# Altium PCB ui_layout-v1.3.PcbDoc
Units mil, origin at the board's own origin, x right, y up, seen from the top; angles counter-clockwise.
Board outline 3110.07 x 2131 mil, 4 copper layers (L1_Signal, L2_PWR, L3_GND, L4_Signal), stack 61.811 mil thick; 83 components, 75 nets, 291 pads, 633 vias.
Unrouted connection lines stored in the file: 88.
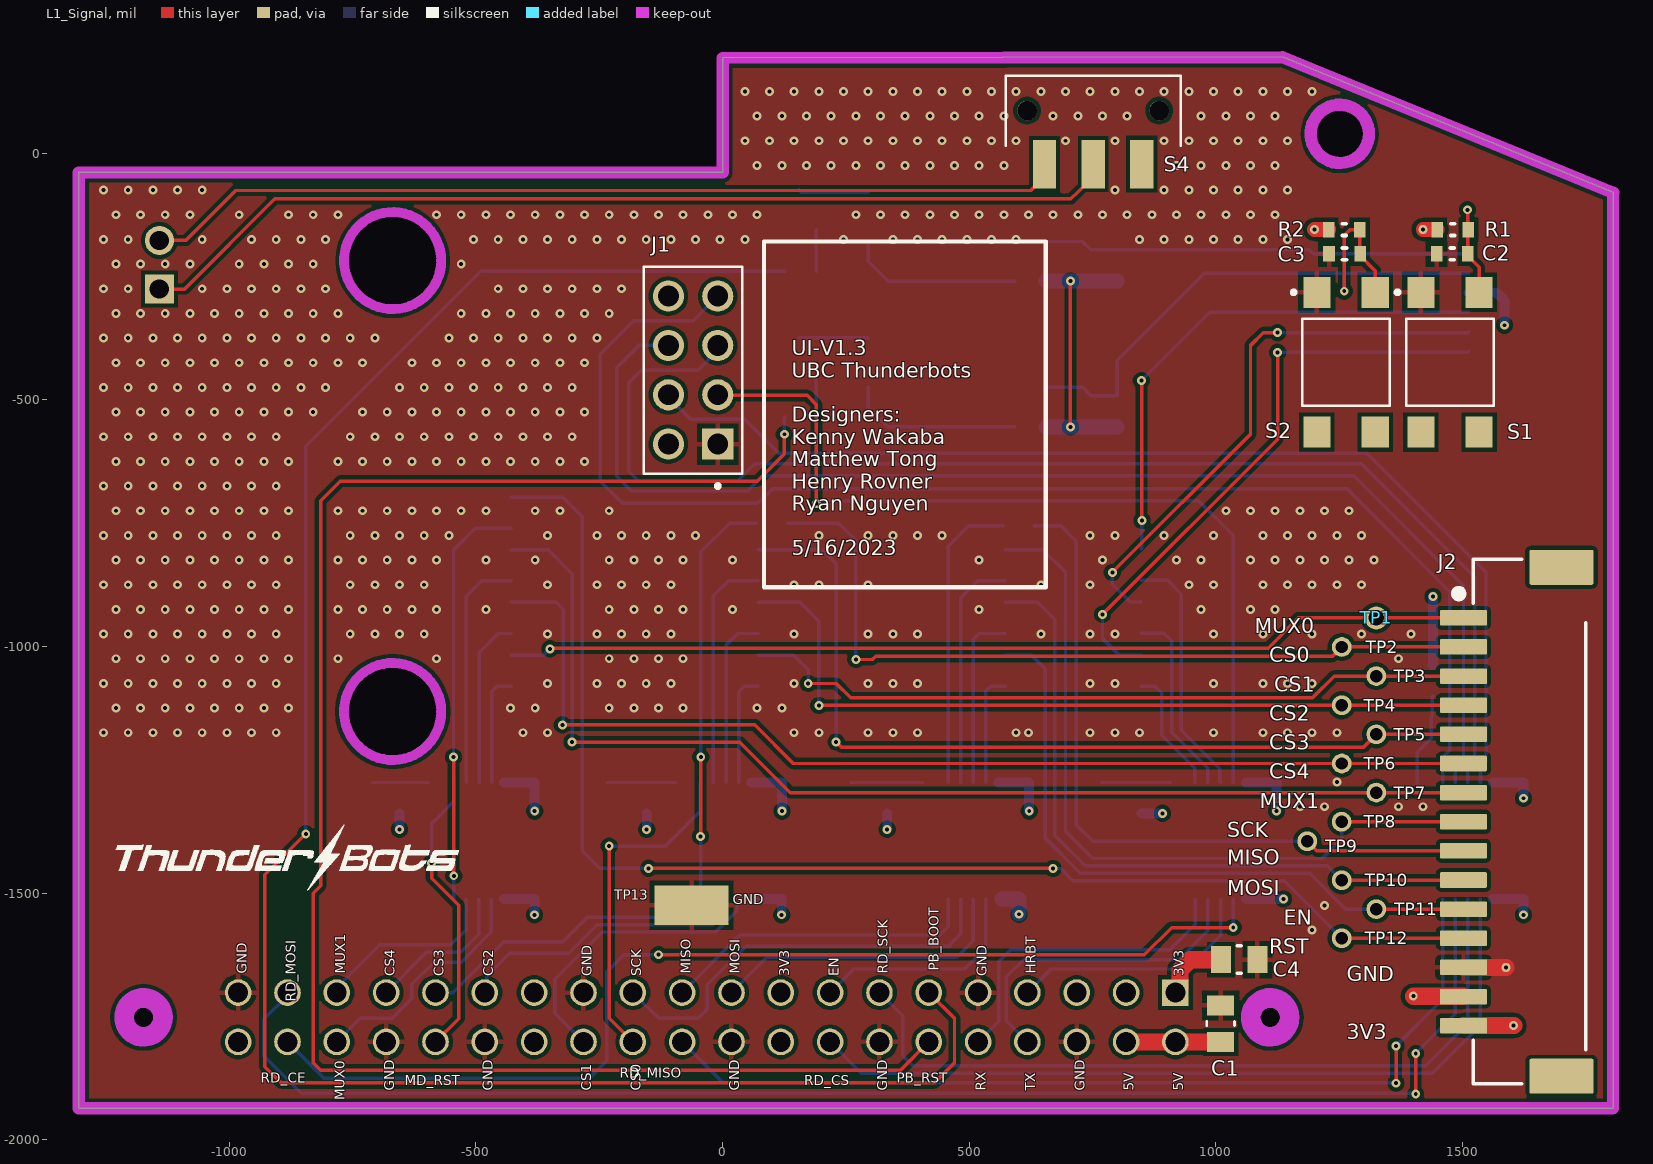
[diagram p0: L1_Signal view]
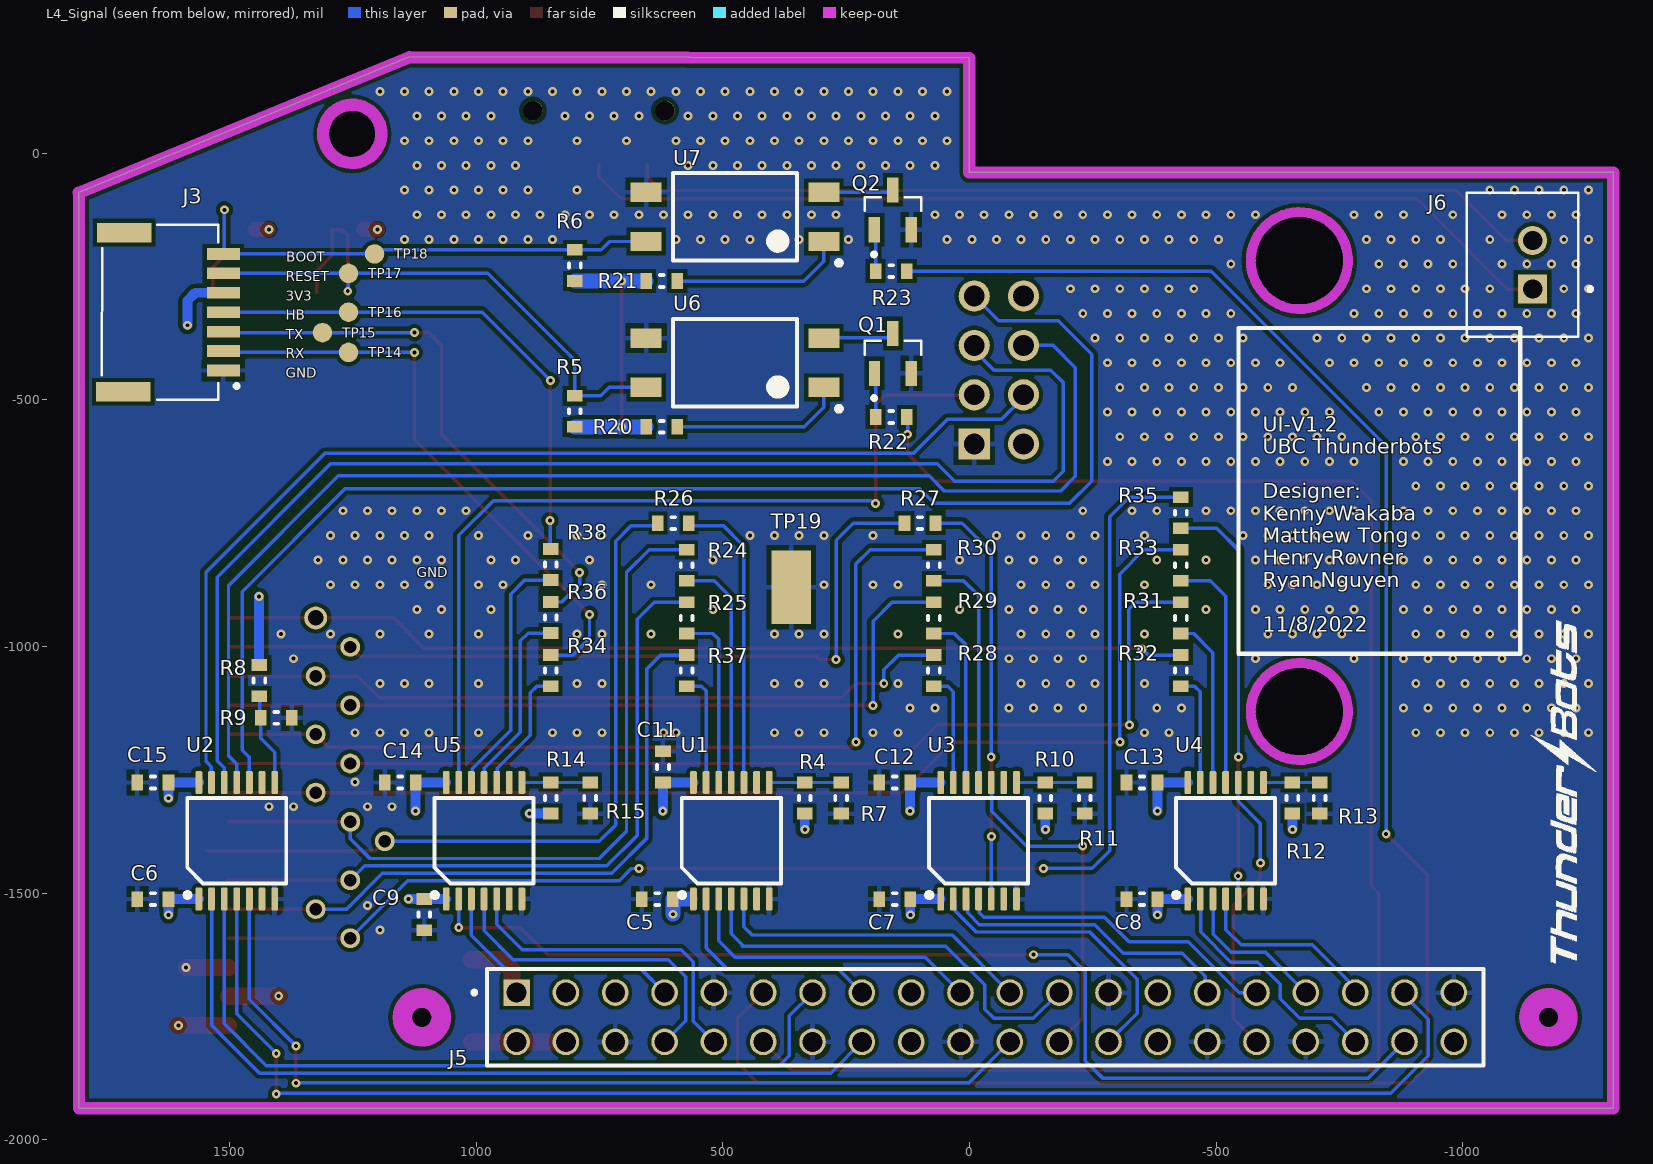
[diagram p1: L4_Signal view, seen from below]
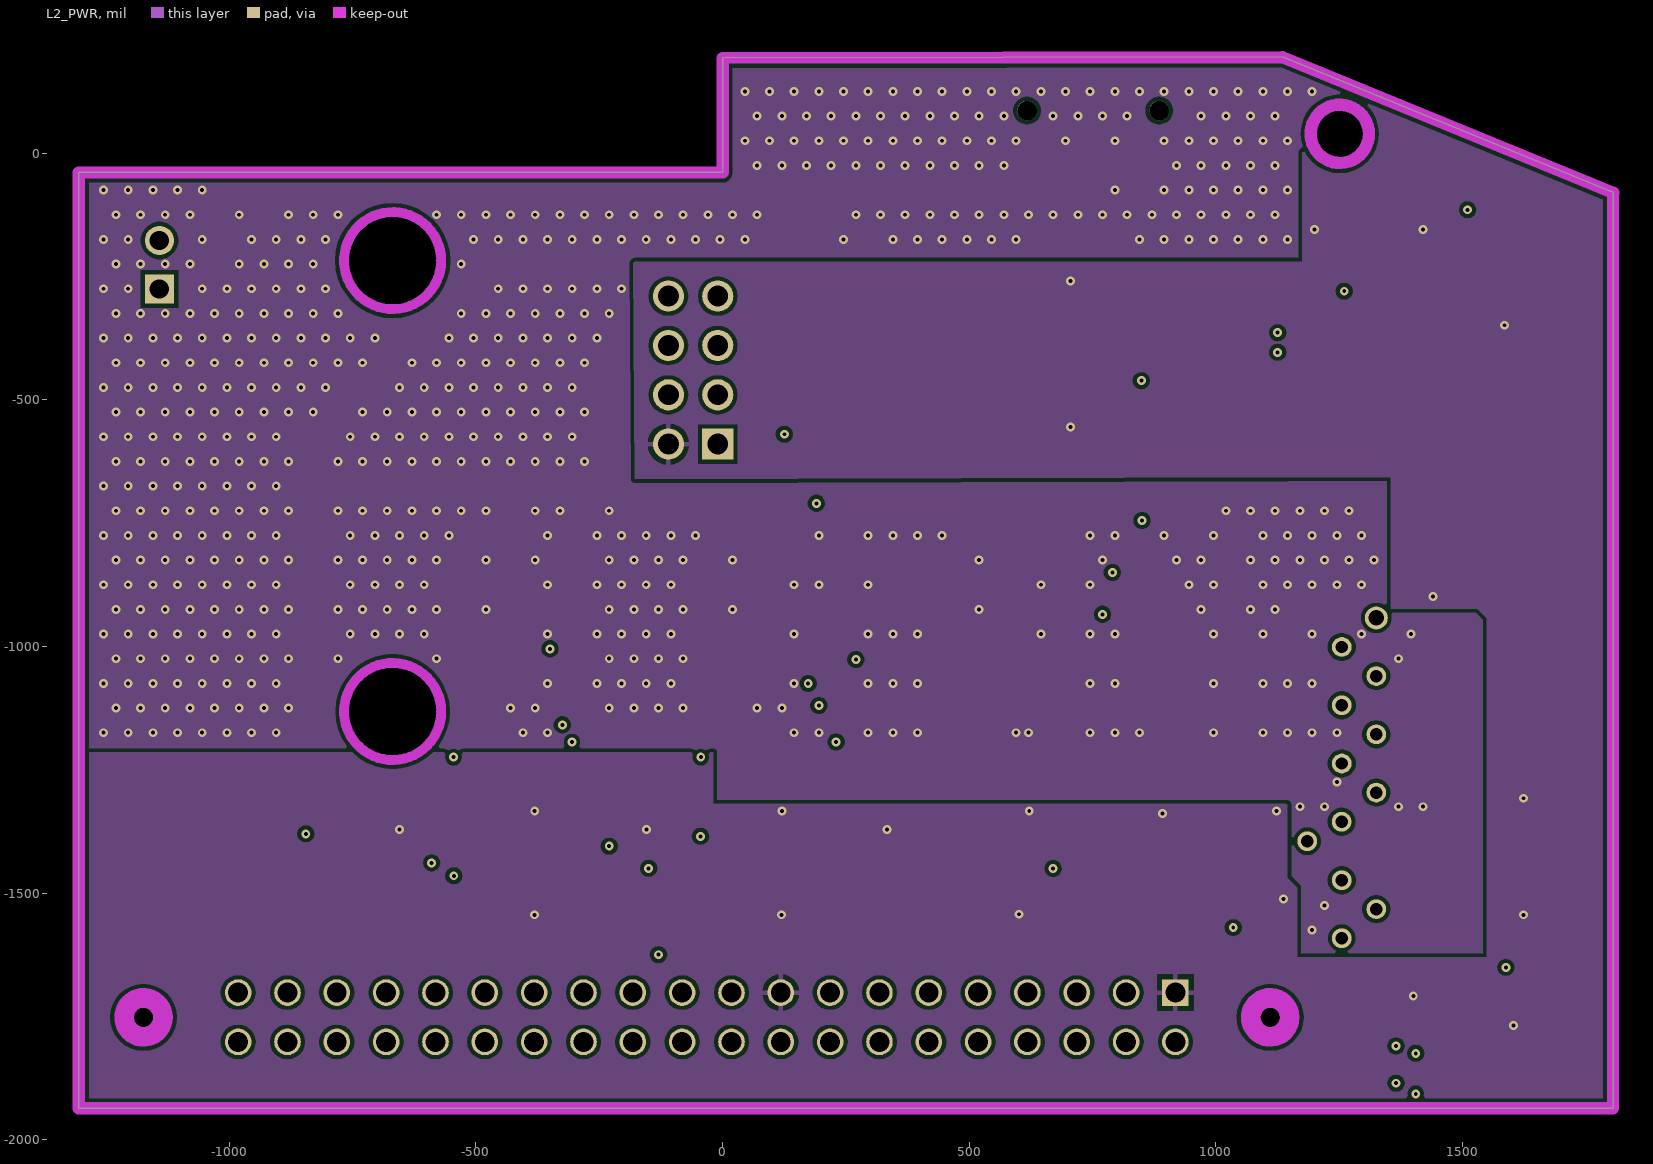
[diagram p2: L2_PWR]
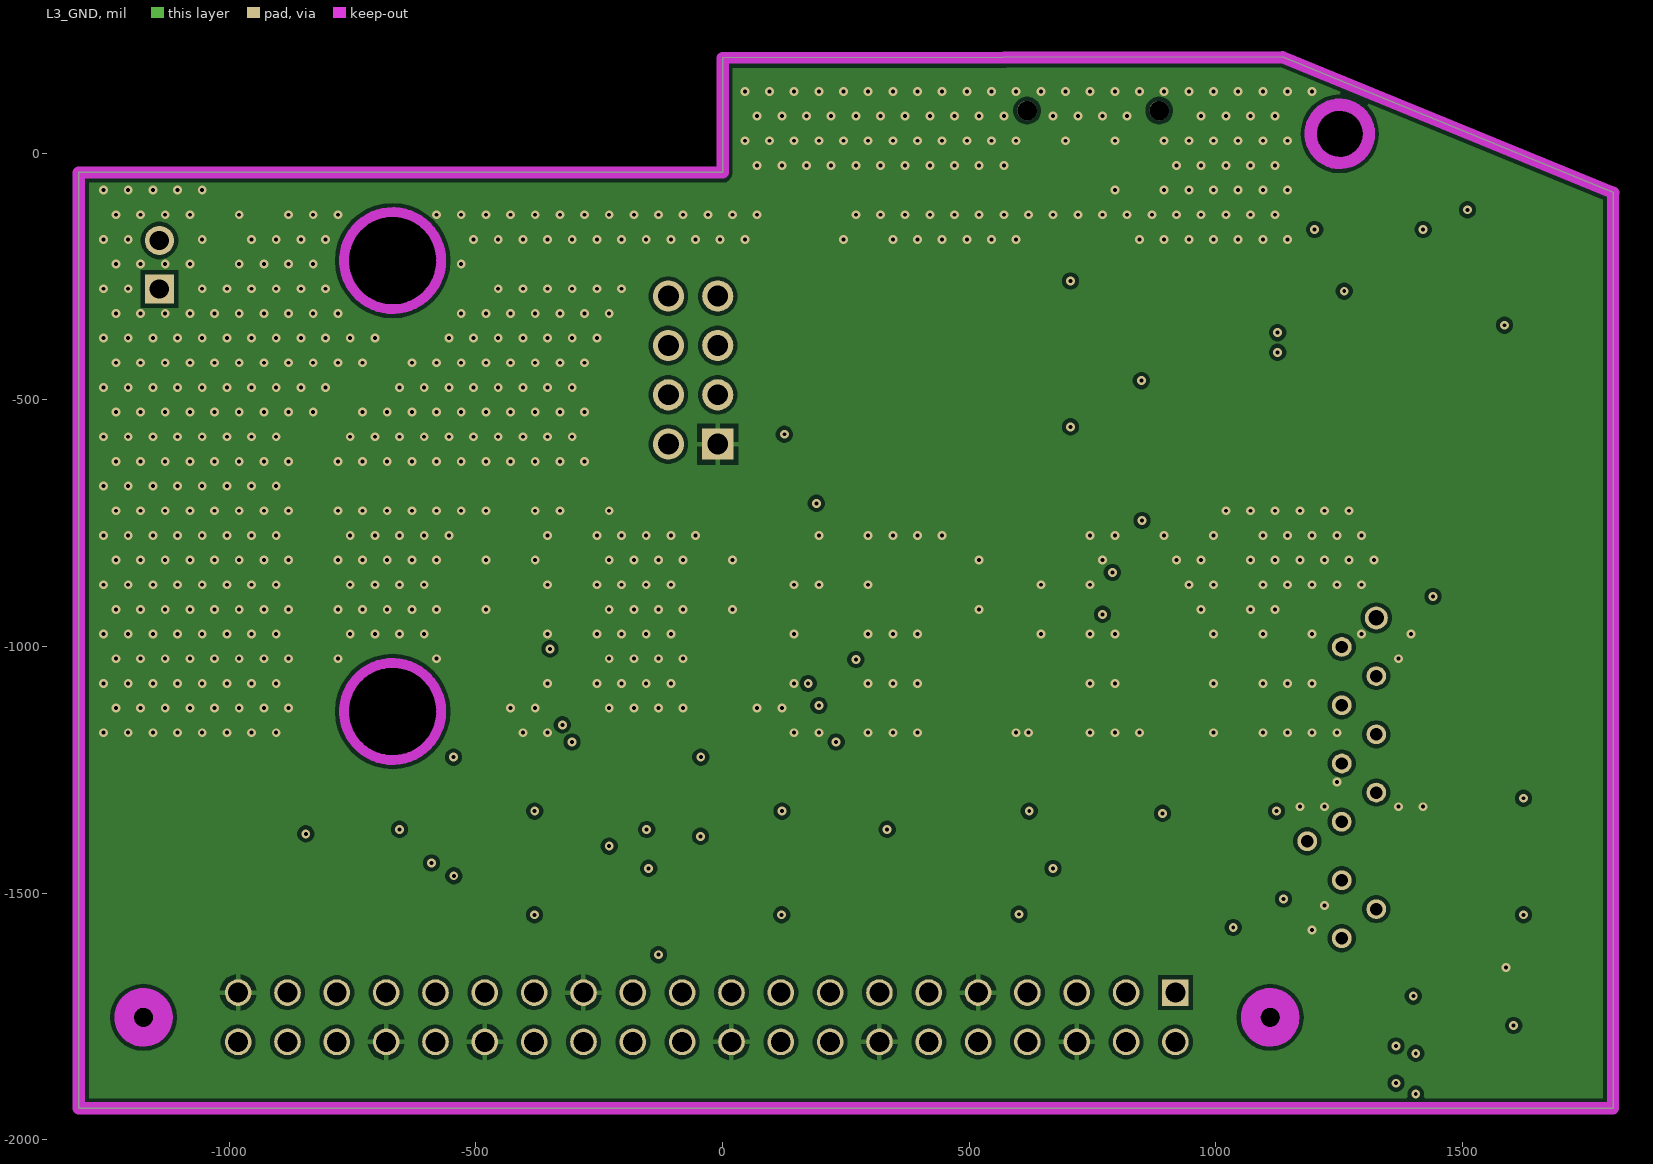
[diagram p3: L3_GND]

## Layer stack, top to bottom
Top Mask: solder mask 0.591, Solder Resist, Dk 3.8
L1_Signal: signal copper 1.378
Dielectric 1: prepreg 3.937, 2313, Dk 4.05
L2_PWR: signal copper 0.689
Core: core 49.803, FR-4, Dk 4.5
L3_GND: signal copper 0.689
Dielectric 2: prepreg 3.937, 2313, Dk 4.05
L4_Signal: signal copper 1.378
Bottom Mask: solder mask 0.591, Solder Resist, Dk 3.8

## Board outline
-1305,-1936 1805,-1936 1805,-1934 1805,-80 1805.07,-79.82 1135,195 0,193.14 0,-39.37 -1305,-39.37

## Design rules (kind name [scope] priority, off if disabled: settings)
BoardOutlineClearance [All] p1: gap=7.87 ignorepadtopadclearanceinfootprint=FALSE except(15.75: Arc-SplitBarrior Arc-SplitContinuation Track-SplitBarrior Track-SplitContinuation SMDPad-SplitBarrior SMDPad-SplitContinuation THPad-SplitBarrior THPad-SplitContinuation Via-SplitBarrior Via-SplitContinuation Fill-SplitBarrior Fill-SplitContinuation Poly-SplitBarrior Poly-SplitContinuation Region-SplitBarrior Region-SplitContinuation Text-SplitBarrior Text-SplitContinuation)
Clearance "JETSON_5V Polygon Clearance" [(InNet('JETSON_5V')) AND InPolygon] p1: gap=15 ignorepadtopadclearanceinfootprint=FALSE
Clearance "POWER_5V Polygon Clearance" [(InNet('POWER_5V')) AND InPolygon] p2: gap=20 ignorepadtopadclearanceinfootprint=TRUE
Clearance [All] p3: gap=8 ignorepadtopadclearanceinfootprint=FALSE
HoleSize [All] p1: absolutevalues=TRUE maxlimit=248.03 minlimit=7.87 maxpercent=80.000 minpercent=20.000
MinimumAnnularRing [All] p1: minimumring=3
MinimumSolderMaskSliver [All] p1: minsoldermaskwidth=3.94
PolygonConnect PolygonConnect_Vias [IsVia] p1: connectstyle=Direct reliefconductorwidth=10 reliefentries=4 polygonreliefangle="90 Angle" airgapwidth=10
PolygonConnect PolygonConnect_NoRelief [InPadClass('NoRelief')] p2: connectstyle=Direct reliefconductorwidth=20 reliefentries=4 polygonreliefangle="90 Angle" airgapwidth=10
PolygonConnect [All] p3: connectstyle=Relief reliefconductorwidth=10 reliefentries=4 polygonreliefangle="90 Angle" airgapwidth=10
RoutingCorners [All] p1: cornerstyle=Round minsetback=100 maxsetback=100
RoutingVias [All] p1: holewidth=8 width=18 viastyle="Through Hole" minholewidth=8 minwidth=18 maxholewidth=39.37 maxwidth=78.74
SilkToSilkClearance [All] p1: silktosilkclearance=3.94
SilkToSolderMaskClearance [IsPad] p1: minsilkscreentomaskgap=3.94 clearancetoexposedcopper=TRUE
SolderMaskExpansion SolderMaskExpansion_Via [IsVia] p1: expansion=4 istentingtop=TRUE
SolderMaskExpansion [All] p2: expansion=4 istentingtop=FALSE
Width [All] p1: maxlimit=100 minlimit=4 preferedwidth=7
25 further rules are at their usual default settings.

## Classes and differential pairs
component class U_radio: J1
component class U_lowpass-filters: R24 R25 R26 R27 R28 R29 R30 R31 R32 R33 R34 R35 R36 R37 R38
component class U_optocoupler: Q1 Q2 R5 R6 R20 R21 R22 R23 U6 U7
component class ui-pcb: ? TP13 TP19
component class U_buffers: C5 C6 C7 C8 C9 C11 C12 C13 C14 C15 R4 R7 R8 R9 R10 R11 R12 R13 R14 R15 U1 U2 U3 U4 U5
component class U_jetson-nano: C1 C4 J5
component class U_power: C2 C3 J3 J6 R1 R2 S1 S2 S4 TP15 TP16 TP17 TP18 TP19
component class U_motor-driver: J2 TP1 TP2 TP3 TP4 TP5 TP6 TP7 TP8 TP9 TP10 TP11 TP12

## Components (designator, comment, footprint, x,y, rotation, side; value= is the part's Value field where it differs from the comment)
C1 "0.10uF 25V" 0805 1009.34,-1764.76 r270 top value=0.1uF
C2 "0.10uF" 0603 1478.78,-204.47 r0 top
C3 "0.10uF" 0603 1260.74,-204.47 r0 top
C4 "0.10uF 25V" 0805 1047,-1635 r180 top value=0.1uF
C5 "0.10uF" 0603 632.5,-1512.11 r0 bottom
C6 "0.10uF" 0603 1655,-1512.11 r0 bottom
C7 "0.10uF" 0603 151.25,-1512.11 r0 bottom
C8 "0.10uF" 0603 -350,-1512.11 r0 bottom
C9 "0.10uF" 0603 1105,-1543.61 r270 bottom
C11 "0.10uF" 0603 621,-1244.39 r90 bottom
C12 "0.10uF" 0603 151.25,-1275.89 r0 bottom
C13 "0.10uF" 0603 -350,-1275.89 r0 bottom
C14 "0.10uF" 0603 1153.75,-1275.89 r0 bottom
C15 "0.10uF" 0603 1655,-1275.89 r0 bottom
J1 "PPPC042LFBN-RC-NRF24L01" PPPC042LFBN-RC-NRF24L01 -10,-590 r270 top
J2 "BM15B-ZESS-TBT(LF)(SN)" "JST ZE SMT 15POS" 1610,-1385 r90 top locked
J3 "SM07B-NSHSS-TB (LF)(SN)" JST_SM07B-NSHSS-TB_(LF)(SN) 1512.24,-440.69 r90 bottom locked
J5 "CN HDR 40POS" "CN HDR 40POS 0.1 TH" -32.17,-1751.77 r0 bottom
J6 "CN HDR 2POS JST XH" JST_B2B-XH-A(LF)(SN) -1121.06,-226.38 r90 bottom
Q1 "TN2130K1-G" SOT95P237X112-3N 154.84,-406.22 r90 bottom
Q2 "TN2130K1-G" SOT95P237X112-3N 155,-115 r90 bottom
R1 "10k" 0603 1480,-155 r0 top
R2 "10k" 0603 1260,-155 r0 top
R4 "JUMPER" 0603 333.66,-1307.39 r90 bottom value=0
R5 "330" 0603 800,-523.5 r270 bottom
R6 "330" 0603 799.65,-227.8 r270 bottom
R7 "JUMPER" 0603 260,-1307.39 r270 bottom value=0
R8 "JUMPER" 0603 1439.03,-1069.32 r270 bottom value=0
R9 "JUMPER" 0603 1405,-1145 r180 bottom value=0
R10 "JUMPER" 0603 -153.75,-1307.39 r90 bottom value=0
R11 "JUMPER" 0603 -233.75,-1307.39 r270 bottom value=0
R12 "JUMPER" 0603 -655,-1307.39 r90 bottom value=0
R13 "JUMPER" 0603 -710,-1307.39 r270 bottom value=0
R14 "JUMPER" 0603 848.75,-1307.39 r90 bottom value=0
R15 "JUMPER" 0603 768.75,-1307.39 r270 bottom value=0
R20 "330" 0603 623.62,-555 r0 bottom
R21 "330" 0603 623.62,-259.29 r0 bottom
R22 "0" 0603 158.31,-535 r0 bottom
R23 "0" 0603 158.31,-239.29 r0 bottom
R24 "JUMPER" 0603 573.09,-835.67 r270 bottom value=0
R25 "JUMPER" 0603 573.09,-942.33 r270 bottom value=0
R26 "JUMPER" 0603 600,-750 r180 bottom value=0
R27 "JUMPER" 0603 100,-750 r180 bottom value=0
R28 "JUMPER" 0603 71.84,-1049 r270 bottom value=0
R29 "JUMPER" 0603 71.84,-942.33 r270 bottom value=0
R30 "JUMPER" 0603 71.84,-835.67 r270 bottom value=0
R31 "JUMPER" 0603 -428.82,-942.33 r270 bottom value=0
R32 "JUMPER" 0603 -428.82,-1049 r270 bottom value=0
R33 "JUMPER" 0603 -428.82,-835.67 r270 bottom value=0
R34 "JUMPER" 0603 848.75,-1049 r270 bottom value=0
R35 "JUMPER" 0603 -428.82,-729 r270 bottom value=0
R36 "JUMPER" 0603 848.75,-941.5 r270 bottom value=0
R37 "JUMPER" 0603 573.09,-1049 r270 bottom value=0
R38 "JUMPER" 0603 848.75,-834 r270 bottom value=0
S1 "TL3305AF260QG" SW_TL3305AF260QG 1474.37,-424 r0 top
S2 "TL3305AF260QG" SW_TL3305AF260QG 1263.74,-424 r0 top
S4 "SW SLIDE SMALL" "SW SLIDE SMALL" 751,86 r180 top
TP1 "Test Point (Via)" TP#1 1325,-942.33 r270 top
TP2 "Test Point (Via)" TP#2 1255,-1001.14 r90 top
TP3 "Test Point (Via)" TP#2 1325,-1060.2 r90 top
TP4 "Test Point (Via)" TP#2 1255,-1119.25 r90 top
TP5 "Test Point (Via)" TP#2 1325,-1178.31 r90 top
TP6 "Test Point (Via)" TP#2 1255,-1237.36 r90 top
TP7 "Test Point (Via)" TP#2 1325,-1296.42 r90 top
TP8 "Test Point (Via)" TP#2 1254.72,-1355.47 r90 top
TP9 "Test Point (Via)" TP#2 1185,-1395 r90 top
TP10 "Test Point (Via)" TP#2 1255,-1474 r90 top
TP11 "Test Point (Via)" TP#2 1325,-1532.64 r90 top
TP12 "Test Point (Via)" TP#2 1255,-1591.69 r90 top
TP13 "Test Point - 5019" TP380X203 -63.04,-1524.56 r180 top
TP14 "Testpoint" TP_1mm 1258.47,-404 r90 bottom
TP15 "Testpoint" TP_1mm 1311.33,-364 r90 bottom
TP16 "Testpoint" TP_1mm 1258.47,-322.58 r90 bottom
TP17 "Testpoint" TP_1mm 1258.47,-243.84 r90 bottom
TP18 "Testpoint" TP_1mm 1205.61,-204.47 r90 bottom
TP19 "Test Point - 5019" TP380X203 361,-880 r90 bottom
U1 "TXU0304PWR" 14-TSSOP 482.5,-1394 r90 bottom
U2 "TXU0304PWR" 14-TSSOP 1485,-1394 r90 bottom
U3 "TXU0304PWR" 14-TSSOP -18.75,-1394 r90 bottom
U4 "TXU0304PWR" 14-TSSOP -519.41,-1394 r90 bottom
U5 "TXU0304PWR" 14-TSSOP 983.75,-1394 r90 bottom
U6 "APC-817D1" APC-817D1 475,-425 r0 bottom
U7 "APC-817D1" APC-817D1 475,-129.29 r0 bottom

## Footprints (in the part's own frame and the unit in brackets; to place one, negate y for a bottom-side part, rotate by r counter-clockwise, add the part's x,y. Pads: shape width x height; smd on the part's side, far side on the other; paste and mask are expansions set on the pad)
14-TSSOP [mm]
  rrect50% 1.2x0.35 smd mask+0.07: 1(-3,1.95) 2(-3,1.3) 3(-3,0.65) 4(-3,0) 5(-3,-0.65) 6(-3,-1.3) 7(-3,-1.95) 8(3,-1.95) 9(3,-1.3) 10(3,-0.65) 11(3,0) 12(3,0.65) 13(3,1.3) 14(3,1.95)
  silkscreen extent -2.8,-2.55 2.2,2.55, body extent -3.2,-2.5 3.2,2.5, height 1.13
0603 [mm] "Chip Resistor, 2-Leads, Body 1.60x0.80mm, IPC High Density"
  rect 0.6x0.8 smd mask+0.1: 1(-0.8,0) 2(0.8,0)
  silkscreen extent -0.1,-0.3 0.1,0.3, body extent -0.8,-0.4 0.8,0.4, height 0.6
0805 [mil] "40 Position Header Connector 0.100\" (2.54mm) Through Hole"
  rect 40x55 smd: 1(-37,0) 2(37,0)
  silkscreen extent -4,-28 4,28, body extent -47,-28 47,28, height 24
APC-817D1 [mm]
  rect 1.6x1 smd: 1(-4.575,1.27) 2(-4.575,-1.27) 3(4.575,-1.27) 4(4.575,1.27)
  silkscreen extent -5.47,-2.25 3.2,2.49, body extent -3.25,-2.3 3.25,2.29, height 3.5
"CN HDR 40POS 0.1 TH" [mm] "40 Position Header Connector 0.100\" (2.54mm) Through Hole"
  rect 1.37x1.37 hole 1.02: 01(24.13,-1.27)
  round 1.37 hole 1.02: 02(24.13,1.27) 03(21.59,-1.27) 04(21.59,1.27) 05(19.05,-1.27) 06(19.05,1.27) 07(16.51,-1.27) 08(16.51,1.27) 09(13.97,-1.27) 10(13.97,1.27) 11(11.43,-1.27) 12(11.43,1.27) 13(8.89,-1.27) 14(8.89,1.27) 15(6.35,-1.27) 16(6.35,1.27) 17(3.81,-1.27) 18(3.81,1.27) 19(1.27,-1.27) 20(1.27,1.27) 21(-1.27,-1.27) 22(-1.27,1.27) 23(-3.81,-1.27) 24(-3.81,1.27) 25(-6.35,-1.27) 26(-6.35,1.27) 27(-8.89,-1.27) 28(-8.89,1.27) 29(-11.43,-1.27) 30(-11.43,1.27) 31(-13.97,-1.27) 32(-13.97,1.27) 33(-16.51,-1.27) 34(-16.51,1.27) 35(-19.05,-1.27) 36(-19.05,1.27) 37(-21.59,-1.27) 38(-21.59,1.27) 39(-24.13,-1.27) 40(-24.13,1.27)
  silkscreen extent -25.66,-2.47 26.4,2.47
"JST ZE SMT 15POS" [mm] "15 POS HDR JST ZE"
  rrect10% 1.8x3.3 smd: 0(-12.35,-2.3) 0(13.85,-2.3)
  rrect10% 0.8x2.4 smd: 1(11.25,2.75) 2(9.75,2.75) 3(8.25,2.75) 4(6.75,2.75) 5(5.25,2.75) 6(3.75,2.75) 7(2.25,2.75) 8(0.75,2.75) 9(-0.75,2.75) 10(-2.25,2.75) 11(-3.75,2.75) 12(-5.25,2.75) 13(-6.75,2.75) 14(-8.25,2.75) 15(-9.75,2.75)
  silkscreen extent -12.75,-3.55 14.26,3, body extent -12.75,-3.55 14.25,3.45, height 7.6
JST_B2B-XH-A(LF)(SN) [mm]
  rect 1.508x1.508 hole 1: 1(-1.25,-0.525)
  round 1.508 hole 1: 2(1.25,-0.525)
  silkscreen extent -3.7,-3.6 3.7,2.88, body extent -3.7,-2.85 3.7,2.9, height 7.1
JST_SM07B-NSHSS-TB_(LF)(SN) [mm]
  rect 0.6x1.7 smd: 1(0,0) 2(1,0) 3(2,0) 4(3,0) 5(4,0) 6(5,0) 7(6,0)
  rect 1x2.8 smd: P1(-1.1,5.15) P2(7.1,5.1)
  silkscreen extent -1.5,-0.78 7.5,6.25, body extent -1.5,-0.5 7.5,6.3, height 4.51
PPPC042LFBN-RC-NRF24L01 [mm]
  rect 1.605x1.605 hole 1.07: 1(0,0)
  round 1.605 hole 1.07: 2(0,-2.54) 3(-2.54,0) 4(-2.54,-2.54) 5(-5.08,0) 6(-5.08,-2.54) 7(-7.62,0) 8(-7.62,-2.54)
  silkscreen extent -9.14,-3.81 2.26,1.27, body extent -11.05,-26.16 3.43,4.19, height 10.54
SOT95P237X112-3N [mm]
  rect 1.3x0.59 smd: 1(-1.025,0.95) 2(-1.025,-0.95) 3(1.025,0)
  silkscreen extent -2.39,-1.46 0.65,1.46, body extent -1.54,-1.5 1.29,1.5, height 1.2
"SW SLIDE SMALL" [mm]
  rect 1.2x2.5 smd: 1(-2.5,2.75) 2(0,2.75) 3(2.5,2.75)
  round 1 hole 1 unplated: ""(-3.4,0) ""(3.4,0)
  silkscreen extent -4.5,-1.8 4.5,1.8, body extent -4.5,-3.75 4.5,3.75, height 3.51
SW_TL3305AF260QG [mm]
  rect 1.4x1.6 smd: 1(-1.5,3.6) 2(-1.5,-3.6) 3(1.5,3.6) 4(1.5,-3.6)
  silkscreen extent -2.8,-2.25 2.25,3.7, body extent -2.25,-3.75 2.25,3.75, height 3.7
TP#1 [mm] "Test point (40mil Standard)"
  round 1.181 hole 0.8: 1(0,0)
TP#2 [mm] "Test point (40mil Standard)"
  round 1.016 hole 0.635: 1(0,0)
TP380X203 [mm]
  rect 3.8x2.03 smd: 1(0,0)
TP_1mm [mm]
  round 1 smd paste-2: 1(0,0)

## Part data
C1 C4: library part "CAP 0.10uF 25V", "CAP CER 0.10UF 25V X7R 0805", Operating Temperature="-55°C ~ 125°C", Rating=25V, Temperature Coefficient=X7R, Tolerance=10%, Part Number="CAP 0.10uF 25V"
C2 C3 C5 C6 C7 C8 C9 C11 C12 C13 C14 C15: library part "CAP 0.10uF 16V", "CAP CER 0.10UF 16V X5R 0603", Operating Temperature="-55°C ~ 85°C", Package=0603/0805, Rating=16V, Temperature Coefficient=X5R, Tolerance=10%, Part Number="CAP 0.10uF 16V"
J1: library part "CN PPPC042LFBN-RC-NRF24L01", "8 Position Header Connector 0.100 (2.54mm) Through Hole Gold", Manufacturer Part Number 1=PPPC042LFBN-RC, Package=None, Supplier Part Number 1=S7107-ND, Availability="In Stock", Check_prices=https://www.snapeda.com/parts/PPPC042LFBN-RC/Sullins+Connector+Solutions/view-part/?ref=eda, MF="Sullins Connector Solutions", MP=PPPC042LFBN-RC, Part Number="CN PPPC042LFBN-RC-NRF24L01", Pin Count=8, Price=None, Purchase-URL=https://pricing.snapeda.com/search/part/PPPC042LFBN-RC/?ref=eda, SnapEDA_Link=https://www.snapeda.com/parts/PPPC042LFBN-RC/Sullins+Connector+Solutions/view-part/?ref=snap, Supplier 1=Digi-Key, Supplier URL 1=https://www.digikey.ca/en/products/detail/sullins-connector-solutions/PPPC042LFBN-RC/810244?utm_adgroup=Rectangular%20Connectors%20-%20Headers%2C%20Receptacles%2C%20Female%20Sockets&utm_source=google&utm_medium=cpc&utm_campaign=Shopping_Product_Connectors
J2: library part "CN 15POS JST ZE SMT", "CONN HEADER VERT SMD 15POS ZE", Supplier Part Number 1=455-4211-1-ND, Manufacturer Part Number 1=BM15B-ZESS-TBT(LF)(SN), Part Number="CN 15POS JST ZE SMT", Pin Count=15, Supplier 1=Digi-Key, Supplier URL 1=https://www.digikey.ca/en/products/detail/jst-sales-america-inc/BM15B-ZESS-TBT-LF-SN/1886999?s=N4IgTCBcDaIEIFkCMBWOBaAWgUQMq-QBU5CAKAGQDEBKU3AOWpAF0BfIA
J3: library part "CN 7POS JST NSH SMT RA", "Connector Header Surface Mount, Right Angle 7 position 0.039\" (1.00mm)", Package=None, Supplier Part Number 1=455-2771-1-ND, Availability=Unavailable, Check_prices=https://www.snapeda.com/parts/SM12B-NSHSS-TB%20(LF)(SN)/JST%20Sales%20America%20Inc./view-part/5255521/?ref=eda, MF="JST Sales America Inc.", MP="SM12B-NSHSS-TB (LF)(SN)", Part Number="CN 7POS JST NSH SMT RA", Pin Count=7, Price=None, SnapEDA_Link=https://www.snapeda.com/parts/SM12B-NSHSS-TB%20(LF)(SN)/JST%20Sales%20America%20Inc./view-part/5255521/?ref=snap, Supplier 1=Digi-Key, Supplier 2=Digi-Key, Supplier 3=Digi-Key, Supplier 4=Digi-Key, Supplier Part Number 2=455-2771-1-ND, Supplier Part Number 3=455-2771-6-ND, Supplier Part Number 4=455-2771-2-ND, Supplier URL 1=https://www.digikey.ca/en/products/detail/jst-sales-america-inc/SM07B-NSHSS-TB-LF-SN/3313637
J5: "40 Position Header Connector", Supplier Part Number 1=S6104-ND, Part Number="CN HDR 40POS", Pin Count=40, Supplier 1=Digi-Key, Supplier URL 1=https://www.digikey.ca/en/products/detail/sullins-connector-solutions/PPTC202LFBN-RC/807240?s=N4IgTCBcDaIMoDYCMAGALAWgHIBEQF0BfIA
J6: "Connector Header Through Hole 2 position 0.098 _2.50mm_ / JST XH", Package=None, MF="JST Sales", MP=B2B-XH-A_LF__SN_, Part Number="CN HDR 2POS JST XH", Pin Count=2, Price=None, SnapEDA_Link=https://www.snapeda.com/parts/B2B-XH-A%28LF%29%28SN%29/JST%20Sales%20America%20Inc./view-part/492310/?ref=snap
Q1 Q2: library part "MOSFET N-CH TN2130K1-G", "N-Channel 300 V 85mA (Tj) 360mW (Tc) Surface Mount TO-236AB (SOT23)", Mfr_Name=Microchip, Supplier Part Number 1=TN2130K1-GCT-ND, Copyright="Copyright (C) 2021 Ultra Librarian. All rights reserved.", Digi-Key_Part_Number_1=TN2130K1-GCT-ND, Digi-Key_Part_Number_2=TN2130K1-GDKR-ND, Digi-Key_Part_Number_3=TN2130K1-GTR-ND, Manufacturer Part Number 1=TN2130K1-G, Manufacturer_Part_Number=TN2130K1-G, Part Number="MOSFET N-CH TN2130K1-G", RefDes=RefDes, Supplier 1=Digi-Key, Supplier URL 1=https://www.digikey.com/en/products/detail/microchip-technology/TN2130K1-G/4902939, Type=DEV
R1 R2: library part "RES 10k 1/8W - 5%", "RES SMD 10K OHM 5% 1/8W 0805", Package=0805, Power (Watts)=0.125W, Tolerance=5%, Part Number="RES 10k 1/8W - 5%"
R4 R7 R8 R9 R10 R11 R12 R13 R14 R15 R24 R25 R26 R27 R28 R29 R30 R31 R32 R33 R34 R35 R36 R37 R38: library part "RES 0 JUMPER", "RES SMD 0 OHM JUMPER GENERIC 0603", Manufacturer Part Number 1=RK73Z1JTTD, Package=0805, Supplier Part Number 1=2019-RK73Z1JTTDCT-ND, Tolerance=N/A, Part Number="RES 0 JUMPER", Supplier 1=Digi-Key, Supplier URL 1=https://www.digikey.ca/en/products/detail/koa-speer-electronics-inc/RK73Z1JTTD/9845478
R5 R6 R20 R21: library part "RES 330.0 1/8W - 5%", "Default Resistor Symbol", Manufacturer Part Number 1=RMCF0603JT330R, Package=0805, Power (Watts)=0.125W, Supplier Part Number 1=RMCF0603JT330RCT-ND, Tolerance=5%, Part Number="RES 330.0 1/8W - 5%", Supplier 1=Digi-Key, Supplier URL 1=https://www.digikey.ca/en/products/detail/stackpole-electronics-inc/RMCF0603JT330R/1757998
R22 R23: library part "RES 0 JUMPER 0603", "Default Resistor Symbol", Package=0805, Power (Watts)=0.125W, Tolerance=N/A, Part Number="RES 0 JUMPER 0603"
S1 S2: library part "SW PUSH SMD", "Tactile Switch SPST-NO Top Actuated Surface Mount", Package="LQFP-48 E-Switch", Supplier Part Number 1=EG5353CT-ND, Availability=Unavailable, Manufacturer Part Number 1=TL3305AF260QG, MF=E-Switch, MP=TL3305AF260QG, Part Number="SW PUSH SMD", Price=None, SnapEDA_Link=https://www.snapeda.com/parts/TL3305AF260QG/E-Switch/view-part/479903/?ref=snap, Supplier 1=Digi-key, Supplier URL 1=https://www.digikey.com/en/products/detail/e-switch/TL3305AF260QG/5816184
S4: "Slide Switch SPDT Surface Mount, Right Angle", Manufacturer Part Number 1="JS102011SAQN SPDT", Package=None, Availability=Unavailable, MF=C&K, MP=JS102011SAQN, Part Number="SW SLIDE SMALL", Price=None, SnapEDA_Link=https://www.snapeda.com/parts/JS102011SAQN/C%26K/view-part/214325/?ref=snap, Supplier 1=Digi-key, Supplier Part Number 1="JS102011SAQN SPDT", Supplier URL 1=https://www.digikey.ca/en/products/detail/c-k/JS102011SAQN/1640095
TP13 TP19: "PC Test Point, Miniature Phosphor Bronze, Silver Plating Surface Mount Mounting Type", Package="2010 Keystone", MF="Keystone Electronics", MP=5019, Part Number="Test Point - 5019"
TP14 TP15 TP16 TP17 TP18: library part TP_1MM, Part Number=TP_1MM
U1 U2 U3 U4 U5: library part TXU0304, "4-Bit Fixed Direction Voltage-Level Translator with Schmitt-Trigger Inputs  and 3-State Outputs", Mfr_Name="Texas Instruments", Supplier Part Number 1=296-TXU0304PWRTR-ND, Copyright="Copyright (C) 2022 Ultra Librarian. All rights reserved.", Digi-Key_Part_Number_1=296-TXU0304PWRTR-ND, Digi-Key_Part_Number_2=296-TXU0304PWRCT-ND, Digi-Key_Part_Number_3=296-TXU0304PWRDKR-ND, Manufacturer_Part_Number=TXU0304PWR, Part Number=TXU0304, RefDes=RefDes, Supplier 1=Digi-Key, Supplier URL 1=https://www.digikey.ca/en/products/detail/texas-instruments/TXU0304PWR/14641423, Type=DEV
U6 U7: "DIP4, DC Input, Optocoupler", Supplier Part Number 1=2007-APC-817D1-SLCT-ND, Part Number=APC-817D1, Supplier 1=Digi-Key, Supplier URL 1=https://www.digikey.ca/en/products/detail/american-bright-optoelectronics-corporation/APC-817D1-SL/16273156
TP1 TP2 TP3 TP4 TP5 TP6 TP7 TP8 TP9 TP10 TP11 TP12: Part Number="Test Point (Via)"

## Free pads (board coordinates)
  round 60 hole 78.74 unplated: 1(-1174,-1752) 1(1110,-1752)
  round 60 hole 196.85 unplated: 1(-669,-1132) 1(-669,-218)
  oct 60x60 hole 118.11 unplated: 1(1251,39)

## Via types
v1: diameter 18, hole 8, L1_Signal to L4_Signal, tented both sides, 633 vias

## Nets (pads, with @x,y where several pads share a name; then routed paths per layer and width w, separated by ;. In a path a pad name is that pad's centre, name@x,y a point inside that pad or via, vN(x,y) a via of type N, cw(c..) or ccw(c..) an arc to the next point about the centre after c; other vN are vias at no path point)
BF_CS_CTRL_0: R27.2 U3.5 | length 841.3
  L1_Signal w7: v1(-45,-1385) -44.67,-1384.67 -44.67,-1224.92 v1(-44.34,-1224.59)
  L4_Signal w7: v1(-45,-1385) -44.67,-1385.33 -44.67,-1511.78 U3.5 ; v1(-44.34,-1224.59) -44.34,-808.34 14,-750 R27.2
BF_CS_CTRL_1: R28.2 U3.13 | length 228.3
  L4_Signal w7: U3.13 32.43,-1091.57 43.5,-1080.5 R28.2
BF_CS_CTRL_2: R29.2 U3.12 | length 353.3
  L4_Signal w7: U3.12 6.84,-997.25 30.26,-973.83 R29.2
BF_CS_CTRL_3: R30.2 U3.11 | length 481.4
  L4_Signal w7: U3.11 -18.75,-897.75 11.84,-867.16 R30.2
BF_CS_CTRL_4: R31.2 U4.12 | length 344.2
  L4_Signal w7: U4.12 -493.82,-1012.82 -454.83,-973.83 R31.2
BF_CTRL_EN: R37.2 U1.13 | length 229
  L4_Signal w7: U1.13 533.68,-1090.32 543.5,-1080.5 R37.2
BF_HRBT: R38.2 U5.12 | length 507.8
  L4_Signal w7: R38.2 901.5,-865.5 930,-894 930,-1170 1007.94,-1247.94 1007.94,-1274.49 U5.12
BF_MISO: R26.2 U1.10 | length 607.8
  L4_Signal w7: U1.10 456.91,-797.09 499,-755 R26.2@568.5,-755
BF_MOSI: R25.2 U1.12 | length 360.1
  L4_Signal w7: U1.12 508.09,-985.75 520.01,-973.83 R25.2
BF_MUX_SEL_0: R32.2 U4.13 | length 227.9
  L4_Signal w7: U4.13 -468.23,-1092.23 -456.5,-1080.5 R32.2
BF_MUX_SEL_1: R33.2 U4.11 | length 481
  L4_Signal w7: U4.11 -519.41,-898.41 -488.16,-867.16 R33.2
BF_RADIO_CE: J1.3 U5.13 | length 1785.7
  L1_Signal w7: J1.3 -8.86,-491.14 171.42,-491.14 190,-509.72 v1(190,-710)
  L4_Signal w7: v1(190,-710) 192.98,-710 198.42,-704.56 964.56,-704.56 1034.93,-774.93 U5.13
BF_RADIO_CS: J1.4 U2.13 | length 2257
  L4_Signal w7: J1.4 -110,-495 -65,-540 45,-540 113.92,-608.92 1306.8,-608.92 1547.4,-849.53 1547.4,-1233.14 1536.54,-1244 1536.54,-1275.53 U2.13 U2.13@1536.18,-1259.16
BF_RADIO_MISO: J1.7 U2.10 | length 2776.7
  L4_Signal w7: J1.7 -60,-340 -180,-340 -248.11,-408.11 -248.11,-665 -203.11,-710 71.55,-710 101.55,-680 1265,-680 1474.17,-889.17 1474.17,-1210.24 1459.41,-1225.01 U2.10
BF_RADIO_MOSI: J1.6 U2.11 | length 2583.8
  L4_Signal w7: J1.6 -170,-390 -215,-435 -215,-655 -185,-685 50.66,-685 81.47,-654.19 1279.19,-654.19 1501.73,-876.73 1501.73,-1221.61 1485,-1238.35 U2.11
BF_RADIO_SCK: J1.5 U2.12 | length 2651.6
  L4_Signal w7: J1.5 -10,-400 -50,-440 -165,-440 -190,-465 -190,-645 -170,-665 29.79,-665 64.79,-630 1295,-630 1524.69,-859.69 1524.69,-1232.15 1510.59,-1246.24 U2.12
BF_RESET: R35.2 U4.5 | length 843
  L1_Signal w7: v1(-545.59,-1224.59) -545.3,-1224.89 -545.3,-1464.7 v1(-545,-1465)
  L4_Signal w7: U4.5@-545.59,-1512.11 -545,-1511.52 v1(-545,-1465) ; v1(-545.59,-1224.59) -545.59,-804.59 -501.5,-760.5 R35.2
BF_RX: R34.2 U5.10 | length 257
  L4_Signal w7: R34.2 876.5,-1080.5 890,-1094 890,-1180 957.35,-1247.35 957.35,-1275.08 U5.10
BF_SCK: R24.2 U1.11 | length 479.2
  L4_Signal w7: U1.11 482.5,-901.5 516.84,-867.16 R24.2
BF_TX: R36.2 U5.11 | length 385.4
  L4_Signal w7: R36.2 894.17,-973 910,-988.83 910,-1173.65 983.33,-1246.97 983.33,-1275.47 U5.11
BOOT: C2.2 J3.7 R1.2 R6.1 S1.3 TP18.1 U7.4 | length 1135.9
  L1_Signal w7: v1(1510,-115) 1510,-153.5 R1.2 1510.28,-156.22 C2.2 1510.28,-208.41 1533.43,-231.56 S1.3
  L4_Signal w7: U7.4 729.29,-179.29 746.3,-196.3 1188.67,-196.3 1196.85,-204.47 TP18.1 J3.7 1510,-202.23 v1(1510,-115)
CS_CTRL_0: J2.2 R27.1 TP2.1 | length 1636.8
  L1_Signal w7: v1(270,-1026.55) 303.45,-1026.55 310,-1020 1236.14,-1020 TP2.1 J2.2
  L4_Signal w7: R27.1 235,-750 270,-785 v1(270,-1026.55)
CS_CTRL_1: J2.3 R28.1 TP3.1 | length 1500.3
  L1_Signal w7: v1(173.45,-1075.2) 230.2,-1075.2 259.25,-1104.25 1195.75,-1104.25 1239.8,-1060.2 1316.07,-1060.2 TP3.1 J2.3
  L4_Signal w7: R28.1 143.5,-1017.5 173.45,-1047.45 v1(173.45,-1075.2)
CS_CTRL_2: J2.4 R29.1 TP4.1 | length 1617
  L1_Signal w7: v1(195,-1120) 195.37,-1119.63 1254.63,-1119.63 TP4.1 J2.4
  L4_Signal w7: R29.1 156.84,-910.84 195,-949 v1(195,-1120)
CS_CTRL_3: J2.5 R30.1 TP5.1 | length 1817.6
  L1_Signal w7: v1(230,-1194) 230.6,-1194 240.6,-1204 1299.31,-1204 TP5.1 J2.5
  L4_Signal w7: R30.1 201.17,-804.17 230,-833 v1(230,-1194)
CS_CTRL_4: J2.6 R31.1 TP6.1 | length 2205.3
  L1_Signal w7: v1(-325,-1159) 65,-1159 143.36,-1237.36 J2.6
  L4_Signal w7: R31.1 -337.16,-910.84 -323.5,-924.5 -323.5,-1157.5 v1(-325,-1159)
CTRL_EN: J2.11 R37.1 TP11.1 | length 1342.9
  L1_Signal w7: TP11.1 J2.11
  L4_Signal w7: R37.1 625.5,-1017.5 653.5,-1045.5 653.5,-1388.5 725,-1460 1190,-1460 1262.64,-1532.64 TP11.1
HRBT: J3.4 R38.1 TP16.1 | length 1063.2
  L1_Signal w7: v1(848.75,-461.25) 849.38,-461.88 849.38,-744.38 v1(850,-745)
  L4_Signal w7: R38.1 850,-801.25 v1(850,-745) ; v1(848.75,-461.25) 987.42,-322.58 TP16.1 J3.4
JETSON_3V3: C4.2 C5.1 C6.1 C7.1 C8.1 C9.1 C11.1 C12.1 C13.1 C14.1 C15.1 J1.2 J2.14 J2.15 J3.5 J5.01 J5.17 R1.1 R2.1 R4.1 R5.2 R6.2 R8.1 R10.1 R12.1 R14.1 R20.2 R21.2 U1.1 U1.14 U2.1 U2.14 U3.1 U3.14 U4.1 U4.14 U5.1 U5.14 | length 2425.3
  L1_Signal w7: v1(705,-555) v1(705,-259.29)
  L1_Signal w30: v1(1200,-155) R2.1 ; v1(1420,-155) R1.1
  L1_Signal w35: J5.01 919.2,-1700.41 918.75,-1699.96 919.42,-1699.29 918.75,-1698.61 920,-1697.36 922.25,-1697.36 927.3,-1692.3 927.3,-1655.5 947.81,-1635 C4.2 ; v1@1400.4,-1709.4 J2.14@1501.33,-1709.4 ; J2.15@1502.54,-1768.72 v1(1603.46,-1768.72)
  L4_Signal w7: R20.2 655.12,-558.94 663.43,-567.25 667.37,-567.25 ; 693.21,-556.79 703.21,-556.79 v1(705,-555)
  L4_Signal w20: v1@-655,-1370.75 R12.1 ; U4.1@-443.23,-1512.11 U4.1 C8.1 v1@-381.5,-1543.98 ; U4.14@-443.23,-1275.89 U4.14 C13.1 -381.25,-1276.14 -381.25,-1333.75 v1(-381,-1334) ; v1(-154,-1371) -153.88,-1370.88 -153.88,-1339.01 R10.1 ; U3.1 C7.1 ; U3.14 C12.1 ; v1@119.75,-1543.98 C7.1 ; C7.1@119.88,-1512.23 C7.1 ; C12.1@120,-1276.14 120,-1333.75 v1(120.25,-1334) ; v1@333.66,-1370.75 R4.1 ; U1.14 C11.1 ; C11.1@621.25,-1276.14 621.25,-1333.75 v1(621.5,-1334) ; R14.1 849.19,-1338.44 v1(891.56,-1338.44) ; U5.1 C9.1 v1@1136.87,-1512.11 ; U5.14 C14.1 C14.1@1122.5,-1276.14 ; v1(1122.75,-1334) 1122.5,-1333.75 C14.1@1122.5,-1276.14 ; C14.1@1123.63,-1277.26 C14.1@1122.5,-1276.14 ; R8.1 1440,-1036.85 v1(1440,-899) ; J3.5 1569.21,-283.21 1585,-299 v1(1585,-349) ; U2.1 C6.1 v1@1623.5,-1543.98 ; U2.14 C15.1 v1@1623.5,-1307.76
  L4_Signal w30: 566.16,-1512.11 C5.1 600.94,-1512.17 v1(600.94,-1542.98) ; R20.2 v1(705,-555) R5.2 ; R21.2 v1(705,-259.29) R6.2 R6.2@800,-259.29
  other v1: 1400,-1709 -381.62,-1544.1 119.63,-1544.1 1623.38,-1544.1 1136.99,-1512.24 -655.12,-1370.88 333.53,-1370.88 1623.38,-1307.88
JETSON_5V: C1.2 J5.02 J5.04 | length 191.5
  L1_Signal w35: J5.04 J5.02 C1.2
JETSON_GND: C1.1 C2.1 C3.1 C4.1 C5.2 C6.2 C7.2 C8.2 C9.2 C11.2 C12.2 C13.2 C14.2 C15.2 J1.1 J2.13 J3.1 J5.06 J5.09 J5.14 J5.20 J5.25 J5.30 J5.34 J5.39 Q1.2 Q2.2 R7.2 R9.2 R11.2 R13.2 R15.2 S1.1 S2.1 TP13.1 TP19.1 U1.7 U2.7 U3.7 U4.7 U5.7 U6.3 U7.3 | length 86
  L1_Signal w35: J2.13 v1(1587.73,-1650.75)
  other v1: 1195,-1575 1220,-1525 1170,-1325 1220,-1325 1370,-1325 1420,-1325 1245,-1275 -1255,-1175 -1205,-1175 -1155,-1175 -1105,-1175 -1055,-1175 -1005,-1175 -955,-1175 -905,-1175 -405,-1175 -355,-1175 145,-1175 195,-1175 295,-1175 345,-1175 395,-1175 595,-1175 620,-1175 745,-1175 795,-1175 845,-1175 995,-1175 1095,-1175 1145,-1175 1195,-1175 1245,-1175 -1230,-1125 -1180,-1125 -1130,-1125 -1080,-1125 -1030,-1125 -980,-1125 -930,-1125 -880,-1125 -430,-1125 -380,-1125 -230,-1125 -180,-1125 -130,-1125 -80,-1125 70,-1125 120,-1125 -1255,-1075 -1205,-1075 -1155,-1075 -1105,-1075 -1055,-1075 -1005,-1075 -955,-1075 -905,-1075 -355,-1075 -255,-1075 -205,-1075 -155,-1075 -105,-1075 145,-1075 295,-1075 345,-1075 395,-1075 745,-1075 795,-1075 995,-1075 1095,-1075 1145,-1075 1195,-1075 -1230,-1025 -1180,-1025 -1130,-1025 -1080,-1025 -1030,-1025 -980,-1025 -930,-1025 -880,-1025 -780,-1025 -580,-1025 -230,-1025 -180,-1025 -130,-1025 -80,-1025 1370,-1025 -1255,-975 -1205,-975 -1155,-975 -1105,-975 -1055,-975 -1005,-975 -955,-975 -905,-975 -755,-975 -705,-975 -655,-975 -605,-975 -355,-975 -255,-975 -205,-975 -155,-975 -105,-975 145,-975 295,-975 345,-975 395,-975 645,-975 745,-975 795,-975 995,-975 1095,-975 1195,-975 1295,-975 1395,-975 -1230,-925 -1180,-925 -1130,-925 -1080,-925 -1030,-925 -980,-925 -930,-925 -880,-925 -780,-925 -730,-925 -680,-925 -630,-925 -580,-925 -480,-925 -230,-925 -180,-925 -130,-925 -80,-925 20,-925 520,-925 970,-925 1070,-925 1120,-925 -1255,-875 -1205,-875 -1155,-875 -1105,-875 -1055,-875 -1005,-875 -955,-875 -905,-875 -755,-875 -705,-875 -655,-875 -605,-875 -355,-875 -255,-875 -205,-875 -155,-875 -105,-875 145,-875 195,-875 295,-875 645,-875 745,-875 945,-875 995,-875 1095,-875 1145,-875 1195,-875 1245,-875 1295,-875 -1230,-825 -1180,-825 -1130,-825 -1080,-825 -1030,-825 -980,-825 -930,-825 -880,-825 -780,-825 -730,-825 -680,-825 -630,-825 -580,-825 -480,-825 -380,-825 -230,-825 -180,-825 -130,-825 -80,-825 20,-825 520,-825 770,-825 920,-825 970,-825 1070,-825 1120,-825 1170,-825 1220,-825 1270,-825 1320,-825 -1255,-775 -1205,-775 -1155,-775 -1105,-775 -1055,-775 -1005,-775 -955,-775 -905,-775 -755,-775 -705,-775 -655,-775 -605,-775 -555,-775 -355,-775 -255,-775 -205,-775 -155,-775 -105,-775 -55,-775 195,-775 295,-775 345,-775 395,-775 445,-775 745,-775 795,-775 895,-775 995,-775 1095,-775 1145,-775 1195,-775 1245,-775 1295,-775 -1230,-725 -1180,-725 -1130,-725 -1080,-725 -1030,-725 -980,-725 -930,-725 -880,-725 -780,-725 -730,-725 -680,-725 -630,-725 -580,-725 -530,-725 -480,-725 -380,-725 -330,-725 -230,-725 1020,-725 1070,-725 1120,-725 1170,-725 1220,-725 1270,-725 -1255,-675 -1205,-675 -1155,-675 -1105,-675 -1055,-675 -1005,-675 -955,-675 -905,-675 -1230,-625 -1180,-625 -1130,-625 -1080,-625 -1030,-625 -980,-625 -930,-625 -880,-625 -780,-625 -730,-625 -680,-625 -630,-625 -580,-625 -530,-625 -480,-625 -430,-625 -380,-625 -330,-625 -280,-625 -1255,-575 -1205,-575 -1155,-575 -1105,-575 -1055,-575 -1005,-575 -955,-575 -905,-575 -755,-575 -705,-575 -655,-575 -605,-575 -555,-575 -505,-575 -455,-575 -405,-575 -355,-575 -305,-575 -1230,-525 -1180,-525 -1130,-525 -1080,-525 -1030,-525 -980,-525 -930,-525 -880,-525 -830,-525 -730,-525 -680,-525 -630,-525 -580,-525 -530,-525 -480,-525 -430,-525 -380,-525 -330,-525 -280,-525 -1255,-475 -1205,-475 -1155,-475 -1105,-475 -1055,-475 -1005,-475 -955,-475 -905,-475 -855,-475 -805,-475 -655,-475 -605,-475 -555,-475 -505,-475 -455,-475 -405,-475 -355,-475 -305,-475 -1230,-425 -1180,-425 -1130,-425 -1080,-425 -1030,-425 -980,-425 -930,-425 -880,-425 -830,-425 -780,-425 -730,-425 -630,-425 -580,-425 -530,-425 -480,-425 -430,-425 -380,-425 -330,-425 -280,-425 -1255,-375 -1205,-375 -1155,-375 -1105,-375 -1055,-375 -1005,-375 -955,-375 -905,-375 -855,-375 -805,-375 -755,-375 -705,-375 -555,-375 -505,-375 -455,-375 -405,-375 -355,-375 -305,-375 -255,-375 -1230,-325 -1180,-325 -1130,-325 -1080,-325 -1030,-325 -980,-325 -930,-325 -880,-325 -830,-325 -780,-325 -530,-325 -480,-325 -430,-325 -380,-325 -330,-325 -280,-325 -230,-325 -1255,-275 -1205,-275 -1055,-275 -1005,-275 -955,-275 -905,-275 -855,-275 -805,-275 -455,-275 -405,-275 -355,-275 -305,-275 -255,-275 -205,-275 -1230,-225 -1180,-225 -1130,-225 -1080,-225 -980,-225 -930,-225 -880,-225 -830,-225 -530,-225 -1255,-175 -1205,-175 -1055,-175 -955,-175 -905,-175 -855,-175 -805,-175 -505,-175 -455,-175 -405,-175 -355,-175 -305,-175 -255,-175 -205,-175 -155,-175 -105,-175 -55,-175 -5,-175 45,-175 245,-175 345,-175 395,-175 445,-175 495,-175 545,-175 595,-175 845,-175 895,-175 945,-175 995,-175 1045,-175 1095,-175 1145,-175 -1230,-125 -1180,-125 -1130,-125 -1080,-125 -980,-125 -880,-125 -830,-125 -780,-125 -580,-125 -530,-125 -480,-125 -430,-125 -380,-125 -330,-125 -280,-125 -230,-125 -180,-125 -130,-125 -80,-125 -30,-125 20,-125 70,-125 270,-125 320,-125 370,-125 420,-125 470,-125 520,-125 570,-125 620,-125 670,-125 720,-125 770,-125 820,-125 870,-125 920,-125 970,-125 1020,-125 1070,-125 1120,-125 -1255,-75 -1205,-75 -1155,-75 -1105,-75 -1055,-75 795,-75 895,-75 945,-75 995,-75 1045,-75 1095,-75 1145,-75 70,-25 120,-25 170,-25 220,-25 270,-25 320,-25 370,-25 420,-25 470,-25 520,-25 570,-25 920,-25 970,-25 1020,-25 1070,-25 1120,-25 45,25 95,25 145,25 195,25 245,25 295,25 345,25 395,25 445,25 495,25 545,25 595,25 695,25 795,25 895,25 945,25 995,25 1045,25 1095,25 1145,25 70,75 120,75 170,75 220,75 270,75 320,75 370,75 420,75 470,75 520,75 570,75 670,75 720,75 770,75 820,75 970,75 1020,75 1070,75 1120,75 45,125 95,125 145,125 195,125 245,125 295,125 345,125 395,125 445,125 495,125 545,125 595,125 645,125 695,125 745,125 795,125 845,125 895,125 945,125 995,125 1045,125 1095,125 1145,125 1195,125
LF_MISO_SRC: J2.9 R26.1 TP9.1 | length 1523.8
  L1_Signal w7: TP9.1 1204.53,-1414.53 J2.9 J2.9@1545.31,-1414.53
  L4_Signal w7: R26.1@631.5,-755 685,-755 717,-787 717,-1362 750,-1395 TP9.1
LF_MOSI_DST: J2.10 R25.1 TP10.1 | length 1420.5
  L1_Signal w7: TP10.1 J2.10@1503.7,-1474
  L4_Signal w7: R25.1 638.84,-910.84 673.38,-945.38 673.38,-1383.38 735,-1445 1226,-1445 TP10.1
LF_MUX_SEL_0_DST: J2.1 R32.1 TP1.1 | length 1961.8
  L1_Signal w7: v1(-350,-1005) -348.37,-1003.37 1105.63,-1003.37 1166.91,-942.09 1325,-942.09 J2.1
  L4_Signal w7: R32.1 -362.5,-1017.5 v1(-350,-1005)
LF_MUX_SEL_1_DST: J2.7 R33.1 TP7.1 | length 2335.3
  L1_Signal w7: v1(-305.5,-1194) 35,-1194 137.42,-1296.42 J2.7
  L4_Signal w7: R33.1 -353.83,-804.17 -304.5,-853.5 -304.5,-1193 v1(-305.5,-1194)
LF_RST_DST: J2.12 R35.1 TP12.1 | length 2697.5
  L1_Signal w7: v1(-150,-1450) -149.88,-1450.12 669.63,-1450.12 v1(669.75,-1450.25) ; TP12.1 J2.12
  L4_Signal w7: R35.1 -324.5,-697.5 -285,-737 -285,-1414 -249,-1450 v1(-150,-1450) ; v1(669.75,-1450.25) 685.25,-1450.25 710,-1475 1138.31,-1475 TP12.1
LF_RX_PWR: J3.2 R34.1 TP14.1 | length 1208
  L1_Signal w7: v1(770,-935) 1125,-580 v1(1125,-404)
  L4_Signal w7: v1(770,-935) 770,-984 803.5,-1017.5 R34.1 ; v1(1125,-404) TP14.1 1509.57,-404 J3.2
LF_SCK_DST: J2.8 R24.1 TP8.1 | length 1546.7
  L1_Signal w7: TP8.1 J2.8
  L4_Signal w7: R24.1 649.17,-804.17 695,-850 695,-1375 750,-1430 1215,-1430 1254.72,-1390.28 TP8.1
LF_TX_PWR: J3.3 R36.1 TP15.1 | length 1127.5
  L1_Signal w7: v1(790,-850) 1070,-570 1070,-390 1096,-364 v1(1125,-364)
  L4_Signal w7: v1(790,-850) 790,-874 826,-910 R36.1 ; v1(1125,-364) TP15.1 1510.2,-364 J3.3
NetQ1_1: Q1.1 R22.2 | length 88.4
  L4_Signal w7: R22.2 Q1.1@189.8,-446.58
NetQ1_3: Q1.3 U6.2 | length 140.5
  L4_Signal w7: Q1.3@154.84,-373.98 293.86,-373.98 U6.2
NetQ2_1: Q2.1 R23.2 | length 83.9
  L4_Signal w7: R23.2 Q2.1@189.8,-155.35
NetQ2_3: Q2.3 U7.2 | length 141.8
  L4_Signal w7: Q2.3 159.65,-79.29 U7.2
NetR4_2: R4.2 R7.1 U1.8 | length 145.7
  L4_Signal w7: R7.1 R4.2 U1.8
NetR8_2: R8.2 R9.1 U2.8 | length 181.4
  L4_Signal w7: U2.8 1408.23,-1214.72 1436.5,-1186.46 R9.1 ; R9.1@1438.29,-1139.31 1438.29,-1101.56 R8.2
NetR10_2: R10.2 R11.1 U3.8 | length 138.2
  L4_Signal w7: R11.1 R10.2 U3.8
NetR12_2: R12.2 R13.1 U4.8 | length 113.2
  L4_Signal w7: R13.1 R12.2 U4.8@-596.77,-1275.89
NetR14_2: R14.2 R15.1 U5.8 | length 138.2
  L4_Signal w7: R15.1 R14.2 U5.8
NetR20_1: R20.1 U6.1 | length 353.7
  L4_Signal w7: U6.1 294.88,-514.88 335,-555 R20.1
NetR21_1: R21.1 U7.1 | length 354
  L4_Signal w7: U7.1 294.88,-219.17 335.71,-260 R21.1@592.13,-260
PB_PGND: J6.2 S4.3 | length 1873.5
  L1_Signal w7: J6.2 -1088.17,-177.17 -986.87,-75.87 624.56,-75.87 652.57,-47.86 S4.3
PB_RESET: C3.2 J3.6 R2.2 R5.1 S2.3 TP17.1 U6.4 | length 1335.7
  L1_Signal w7: v1(1260,-280) 1260,-166.81 1271.81,-155 R2.2 1291.5,-203.73 C3.2 1292.24,-208.41 1322.8,-238.97 S2.3
  L4_Signal w7: U6.4 730,-475 747.01,-492.01 R5.1 800,-420 976.16,-243.84 TP17.1 ; v1(1260,-280) 1259.23,-279.23 1259.23,-244.61 TP17.1 ; J3.6 TP17.1
PWR_ON: J6.1 S4.2 | length 2012.7
  L1_Signal w7: J6.1 -1090.59,-275.59 -908,-93 705.86,-93 720.87,-77.99 751,-47.86 S4.2
SRC_BOOT: J5.11 R23.1 | length 4003.5
  L1_Signal w7: v1(-845,-1380) -927.83,-1462.83 -927.83,-1852.11 -894.94,-1885 429.2,-1885 470,-1844.2 470,-1753.94 J5.11
  L4_Signal w7: v1(-845,-1380) -845,-594 -490.29,-239.29 R23.1
SRC_CS_CTRL_0: J5.24 U3.10 | length 689.3
  L1_Signal w7: v1(-230,-1405) -230,-1753.94 J5.24
  L4_Signal w7: v1(-230,-1405) -116.05,-1405 -45,-1333.95 -45,-1276.55 U3.10
SRC_CS_CTRL_1: J5.26 U3.2 | length 602.6
  L4_Signal w7: J5.26 -340,-1743.94 -340,-1675 -244,-1579 -14,-1579 29.04,-1535.96 29.04,-1515.5 U3.2
SRC_CS_CTRL_2: J5.29 U3.3 | length 599.5
  L4_Signal w7: J5.29 -478.4,-1698.01 -478.4,-1668.4 -431.65,-1621.65 -311.65,-1621.65 -254,-1564 -20.21,-1564 3.45,-1540.34 3.45,-1515.5 U3.3
SRC_CS_CTRL_3: J5.31 U3.4 | length 657.6
  L4_Signal w7: J5.31 -546.77,-1701.77 -443.69,-1598.69 -323.69,-1598.69 -274,-1549 -29,-1549 -20.1,-1540.1 -20.1,-1513.46 U3.4
SRC_CS_CTRL_4: J5.33 U4.3 | length 308
  L4_Signal w7: J5.33 -600.39,-1620 -531.21,-1620 -494.41,-1583.2 U4.3@-494.41,-1512.11
SRC_CTRL_EN: J5.15 U1.2 | length 452.5
  L4_Signal w7: J5.15 265.61,-1654 491,-1654 533.68,-1611.32 533.68,-1559.66 U1.2
SRC_HRBT: J5.07 U5.3 | length 513.2
  L4_Signal w7: J5.07 665.61,-1654 941,-1654 1009.34,-1585.66 U5.3
SRC_MD_MISO: J5.21 U1.5 | length 650.4
  L4_Signal w7: J5.21 34.61,-1585 440,-1585 456.91,-1568.09 U1.5
SRC_MD_MOSI: J5.19 U1.3 | length 618.5
  L4_Signal w7: J5.19 89.61,-1630 475,-1630 508.09,-1596.91 508.09,-1559.66 U1.3
SRC_MD_RESET: J5.32 U4.10 | length 587.1
  L1_Signal w7: v1(-590,-1439) -590,-1470 -535,-1525 -535,-1754.61 J5.32
  L4_Signal w7: v1(-590,-1439) -590,-1359 -545,-1314 -545,-1276.48 U4.10@-545.59,-1275.89
SRC_MD_SCK: J5.23 U1.4 | length 855.4
  L4_Signal w7: J5.23 -129.94,-1754 -50,-1754 -31.24,-1735.24 -31.24,-1686.24 47.5,-1607.5 460,-1607.5 ; 460,-1605 482.5,-1582.5 U1.4
SRC_MUX_SEL_0: J5.36 U4.2 | length 489.4
  L4_Signal w7: J5.36 -734.39,-1754 -670,-1754 -630,-1714 -630,-1685 -585,-1640 -530,-1640 -468.82,-1578.82 U4.2@-468.82,-1512.11
SRC_MUX_SEL_1: J5.35 U4.4 | length 382.6
  L4_Signal w7: J5.35 -782.17,-1692.17 -695,-1605 -551,-1605 -520,-1574 U4.4@-520,-1512.11
SRC_RADIO_CE: J5.38 U5.2 | length 2237.2
  L1_Signal w7: v1(-130,-1625) 855,-1625 910,-1570 v1(1035,-1570)
  L4_Signal w7: J5.38 -808.94,-1875 -270,-1875 -235,-1840 -235,-1660 -200,-1625 v1(-130,-1625) ; v1(1035,-1570) U5.2@1034.97,-1512.14
SRC_RADIO_CS: J5.16 U2.2 | length 1640.5
  L4_Signal w7: J5.16 281.06,-1865 1438.98,-1865 1536.18,-1767.8 U2.2
SRC_RADIO_MISO: J5.22 U2.5 | length 1894.3
  L1_Signal w7: v1(1365,-1885.5) v1(1365,-1810)
  L4_Signal w7: J5.22 1.06,-1885 1364.5,-1885 v1(1365,-1885.5) ; v1(1365,-1810) 1459.41,-1715.59 U2.5
SRC_RADIO_MOSI: J5.37 U2.4 | length 2943
  L1_Signal w7: v1(1405,-1907.04) v1(1405,-1825)
  L4_Signal w7: J5.37 -882.17,-1708.35 -930,-1756.19 -930,-1830 -854,-1906 1403.96,-1906 v1(1405,-1907.04) ; v1(1405,-1825) 1485,-1745 U2.4
SRC_RADIO_SCK: J5.13 U2.3 | length 1589.4
  L4_Signal w7: J5.13 365,-1748.94 365,-1830 385,-1850 1425,-1850 1510.59,-1764.41 U2.3
SRC_RESET: J5.12 R22.1 | length 3478.2
  L1_Signal w7: v1(125,-570) 125,-610 70,-665 -775,-665 -815,-705 -815,-1485.24 -830,-1500.24 -830,-1844.15 -815.09,-1859.06 360.55,-1859.06 J5.12
  L4_Signal w7: v1(125,-570) 125,-536.81 R22.1
SRC_RX: J5.10 U5.5 | length 661.1
  L4_Signal w7: J5.10 559.86,-1759.75 559.86,-1639.14 584,-1615 906.69,-1615 958.16,-1563.54 U5.5
SRC_TX: J5.08 U5.4 | length 661.2
  L4_Signal w7: J5.08 575,-1758.94 575,-1670 610,-1635 925,-1635 983.75,-1576.25 U5.4
pads on no net: J1.8 J2.0 J3.P1 J3.P2 J5.03 J5.05 J5.18 J5.27 J5.28 J5.40 S1.2 S1.4 S2.2 S2.4 S4. S4.1 U1.6 U1.9 U2.6 U2.9 U3.6 U3.9 U4.6 U4.9 U5.6 U5.9

## Polygon pours and split planes (outlines as drawn)
JETSON_GND on L2_PWR "JETSON_GND_L02_P200" (solid, remove dead copper, pour order 200): -1305,-1936 1805,-1936 1805,-1934 1805,-80 1805.07,-79.82 1135,195 0,193.14 0,0 -1305,0
JETSON_3V3 on L2_PWR "L2_PWR-JETSON_3V3" (solid, remove dead copper, pour order 198): 1175,-220 -181.68,-220 -178.39,-660.76 1145,-657.31 1354.25,-657.31 1354.25,-924 1530,-924 1548.98,-942.98 1548.98,-1332 1548.98,-1630 1165.12,-1630 1165.12,-1489 1145,-1468.88 1145,-1320 1212,-1320 1211,-1319 -18.75,-1319 -18.75,-1215 -1305,-1215 -1305,-1934 1805,-1934 1805,193.14 1175,193.79
JETSON_GND on L3_GND "JETSON_GND_L03_P193" (solid, remove dead copper, pour order 193): -1305,-1936 1805,-1936 1805,-1934 1805,-80 1805.07,-79.82 1135,195 0,193.14 0,0 -1305,0
JETSON_GND on L1_Signal "JETSON_GND_L01_P190" (solid, remove dead copper, pour order 190): -1305,-1936 1805,-1936 1805,-1934 1805,-80 1805.07,-79.82 1135,195 0,193.14 0,0 -1305,0
JETSON_GND on L4_Signal "JETSON_GND_L04_P191" (solid, remove dead copper, pour order 191): -1305,-1935.59 1805,-1935.59 1805,-1933.59 1805,-79.59 1805.07,-79.41 1135,195.41 0,193.54 0,0.41 -1305,0.41

## Keep-outs
Keep-Out Layer:
  circle w25: c1251,39 r59.06
  circle w40: c-1174,-1752 r39.37
  circle w40: c1110,-1752 r39.37
  circle w20: c-669,-1132 r98.43
  circle w20: c-669,-218 r98.43
  lines w25: 1805,-1936.54 -1305,-1936.54 -1305,-39.37 0,-39.37 0,192.6 1135,194.46 1805.07,-80.36 ; 1805,-1934.54 1805,-80.54

## Silkscreen, mask and mechanical layers (free items; w line width, h text height)
Top Overlay:
  drawing of 16 lines, arcs and shapes, not listed
  text "UI-V1.3 / UBC Thunderbots /  / Designers: / Kenny Wakaba / Matthew Tong / Henry Rovner / Ryan Nguyen /  / 5/16/2023" at 140,-815 h30
  text "MUX0" at 1078.32,-973.41 h30
  text "CS0" at 1108.31,-1032.47 h30
  text "CS1" at 1118.31,-1091.52 h30
  text "CS2" at 1108.31,-1150.58 h30
  text "CS3" at 1108.31,-1209.63 h30
  text "CS4" at 1108.31,-1268.69 h30
  text "MUX1" at 1088.32,-1327.74 h30
  text "SCK" at 1023.32,-1386.8 h30
  text "MISO" at 1023.32,-1442.52 h30
  text "MOSI" at 1023.32,-1504.91 h30
  text "GND" at 20,-1522.59 h20
  text "EN" at 1136.95,-1563.96 h30
  text "RST" at 1108.31,-1623.02 h30
  text "PB_BOOT" at 438.21,-1657.4 h20 r90
  text "GND" at -965,-1663.55 h20 r90
  text "MUX1" at -765,-1663.55 h20 r90
  text "MISO" at -65,-1663.54 h20 r90
  text "MOSI" at 35,-1663.55 h20 r90
  text "RD_SCK" at 335,-1663.54 h20 r90
  text "HRBT" at 635,-1663.54 h20 r90
  text "CS4" at -665,-1668.55 h20 r90
  text "CS3" at -565,-1668.55 h20 r90
  text "CS2" at -465,-1668.55 h20 r90
  text "GND" at -265,-1668.55 h20 r90
  text "SCK" at -165,-1668.54 h20 r90
  text "3V3" at 135,-1668.55 h20 r90
  text "EN" at 235,-1668.54 h20 r90
  text "GND" at 535,-1668.55 h20 r90
  text "3V3" at 935,-1668.55 h20 r90
  text "GND" at 1265,-1678.74 h30
  text "RD_MOSI" at -865,-1720.19 h20 r90
  text "3V3" at 1265,-1796.85 h30
  text "RD_MISO" at -208.16,-1874.05 h20
  text "RD_CE" at -936.25,-1885 h20
  text "PB_RST" at 352.61,-1885 h20
  text "MD_RST" at -644.81,-1890 h20
  text "RD_CS" at 165.18,-1890 h20
  text "GND" at -666.17,-1900.32 h20 r90
  text "GND" at -466.17,-1900.32 h20 r90
  text "CS1" at -266.17,-1900.32 h20 r90
  text "CS0" at -166.17,-1900.32 h20 r90
  text "GND" at 33.83,-1900.32 h20 r90
  text "GND" at 333.83,-1900.32 h20 r90
  text "RX" at 533.83,-1900.32 h20 r90
  text "TX" at 633.83,-1900.32 h20 r90
  text "GND" at 733.83,-1900.32 h20 r90
  text "5V" at 833.83,-1900.32 h20 r90
  text "5V" at 933.83,-1900.32 h20 r90
  text "MUX0" at -766.17,-1920.31 h20 r90
Bottom Overlay:
  drawing of 16 lines, arcs and shapes, not listed
  text "BOOT" at 1385,-220 h20
  text "RESET" at 1386,-260 h20
  text "3V3" at 1386,-299 h20
  text "HB" at 1386,-338 h20
  text "TX" at 1386,-377 h20
  text "RX" at 1386,-416 h20
  text "GND" at 1386,-455 h20
  text "GND" at 1120,-860 h20
  text "UI-V1.2 / UBC Thunderbots /  / Designer: / Kenny Wakaba / Matthew Tong / Henry Rovner / Ryan Nguyen /  / 11/8/2022" at -595,-970 h30
Mechanical 1:
  lines w7: 1805,-1936 -1305,-1936 -1305,-39.37 0,-39.37 0,193.14 1135,195 1805.07,-79.82 ; 1805,-1934 1805,-80
Drill Drawing:
  drawing of 399 lines, arcs and shapes, not listed
  text "Layer" at 2215.34,1260 h60
  text "Name" at 2625.26,1260 h60
  text "Material" at 3555,1260 h60
  text "Thickness" at 4414.77,1260 h60
  text "Constant" at 5064.6,1260 h60
  text "Board Layer Stack" at 5634.46,1260 h60
  text "Top Overlay" at 2625.26,1140 h60
  text "Top Mask" at 2625.26,1020 h60
  text "Solder Resist" at 3555,1020 h60
  text "0.59mil" at 4414.77,1020 h60
  text "3.8" at 5064.6,1020 h60
  text "1" at 2215.34,900 h60
  text "L1_Signal" at 2625.26,900 h60
  text "1.38mil" at 4414.77,900 h60
  text "Dielectric 1" at 2625.26,780 h60
  text "2313" at 3555,780 h60
  text "3.94mil" at 4414.77,780 h60
  text "4.05" at 5064.6,780 h60
  text "2" at 2215.34,660 h60
  text "L2_PWR" at 2625.26,660 h60
  text "0.69mil" at 4414.77,660 h60
  text "Core" at 2625.26,540 h60
  text "FR-4" at 3555,540 h60
  text "49.80mil" at 4414.77,540 h60
  text "4.5" at 5064.6,540 h60
  text "3" at 2215.34,420 h60
  text "L3_GND" at 2625.26,420 h60
  text "0.69mil" at 4414.77,420 h60
  text "Dielectric 2" at 2625.26,300 h60
  text "2313" at 3555,300 h60
  text "3.94mil" at 4414.77,300 h60
  text "4.05" at 5064.6,300 h60
  text "4" at 2215.34,180 h60
  text "L4_Signal" at 2625.26,180 h60
  text "1.38mil" at 4414.77,180 h60
  text "Bottom Mask" at 2625.26,60 h60
  text "Solder Resist" at 3555,60 h60
  text "0.59mil" at 4414.77,60 h60
  text "3.8" at 5064.6,60 h60
  text "Bottom Overlay" at 2625.26,-60 h60
  text "Symbol" at 2232.5,-272.5 h72
  text "Count" at 2738.38,-272.5 h72
  text "Hole Size" at 3338.22,-272.5 h72
  text "Plated" at 4487.88,-272.5 h72
  text "Hole Type" at 4993.76,-272.5 h72
  text "Drill Layer Pair" at 5727.56,-272.5 h72
  text "Via/Pad" at 7017.18,-272.5 h72
  text "Pad Shape" at 7607.03,-272.5 h72
  text "Template" at 8352.82,-272.5 h72
  text "Description" at 9712.42,-272.5 h72
  text "Hole Tolerance (+)" at 10566.18,-272.5 h72
  text "Hole Tolerance (-)" at 11899.79,-272.5 h72
  text "1" at 2738.38,-422.5 h60
  text "31.50mil (0.800mm)" at 3338.22,-422.5 h60
  text "PTH" at 4487.88,-422.5 h60
  text "Round" at 4993.76,-422.5 h60
  text "L1_Signal - L4_Signal" at 5727.56,-422.5 h60
  text "Pad" at 7017.18,-422.5 h60
  text "Rounded" at 7607.03,-422.5 h60
  text "c118h80" at 8352.82,-422.5 h60
  text "1" at 2738.38,-572.5 h60
  text "118.11mil (3.000mm)" at 3338.22,-572.5 h60
  text "NPTH" at 4487.88,-572.5 h60
  text "Round" at 4993.76,-572.5 h60
  text "L1_Signal - L4_Signal" at 5727.56,-572.5 h60
  text "Pad" at 7017.18,-572.5 h60
  text "Octagonal" at 7607.03,-572.5 h60
  text "s152hn300c50(Tol20-20)" at 8352.82,-572.5 h60
  text "7.87mil (0.200mm)" at 10566.18,-572.5 h60
  text "7.87mil (0.200mm)" at 11899.79,-572.5 h60
  text "2" at 2738.38,-722.5 h60
  text "39.37mil (1.000mm)" at 3338.22,-722.5 h60
  text "NPTH" at 4487.88,-722.5 h60
  text "Round" at 4993.76,-722.5 h60
  text "L1_Signal - L4_Signal" at 5727.56,-722.5 h60
  text "Pad" at 7017.18,-722.5 h60
  text "Rounded" at 7607.03,-722.5 h60
  text "c100hn100(Tol20-20)" at 8352.82,-722.5 h60
  text "7.87mil (0.200mm)" at 10566.18,-722.5 h60
  text "7.87mil (0.200mm)" at 11899.79,-722.5 h60
  text "2" at 2738.38,-872.5 h60
  text "39.37mil (1.000mm)" at 3338.22,-872.5 h60
  text "PTH" at 4487.88,-872.5 h60
  text "Round" at 4993.76,-872.5 h60
  text "L1_Signal - L4_Signal" at 5727.56,-872.5 h60
  text "Pad" at 7017.18,-872.5 h60
  text "(Mixed)" at 7607.03,-872.5 h60
  text "(Mixed)" at 8352.82,-872.5 h60
  text "5.12mil (0.130mm)" at 10566.18,-872.5 h60
  text "3.15mil (0.080mm)" at 11899.79,-872.5 h60
  text "2" at 2738.38,-1022.5 h60
  text "78.74mil (2.000mm)" at 3338.22,-1022.5 h60
  text "NPTH" at 4487.88,-1022.5 h60
  text "Round" at 4993.76,-1022.5 h60
  text "L1_Signal - L4_Signal" at 5727.56,-1022.5 h60
  text "Pad" at 7017.18,-1022.5 h60
  text "Rounded" at 7607.03,-1022.5 h60
  text "c152hn200(Tol20-20)" at 8352.82,-1022.5 h60
  text "7.87mil (0.200mm)" at 10566.18,-1022.5 h60
  text "7.87mil (0.200mm)" at 11899.79,-1022.5 h60
  text "2" at 2738.38,-1172.5 h60
  text "196.85mil (5.000mm)" at 3338.22,-1172.5 h60
  text "NPTH" at 4487.88,-1172.5 h60
  text "Round" at 4993.76,-1172.5 h60
  text "L1_Signal - L4_Signal" at 5727.56,-1172.5 h60
  text "Pad" at 7017.18,-1172.5 h60
  text "Rounded" at 7607.03,-1172.5 h60
  text "c152hn500(Tol20-20)" at 8352.82,-1172.5 h60
  text "7.87mil (0.200mm)" at 10566.18,-1172.5 h60
  text "7.87mil (0.200mm)" at 11899.79,-1172.5 h60
  text "8" at 2738.38,-1322.5 h60
  text "42.13mil (1.070mm)" at 3338.22,-1322.5 h60
  text "PTH" at 4487.88,-1322.5 h60
  text "Round" at 4993.76,-1322.5 h60
  text "L1_Signal - L4_Signal" at 5727.56,-1322.5 h60
  text "Pad" at 7017.18,-1322.5 h60
  text "(Mixed)" at 7607.03,-1322.5 h60
  text "(Mixed)" at 8352.82,-1322.5 h60
  text "11" at 2738.38,-1472.5 h60
  text "25.00mil (0.635mm)" at 3338.22,-1472.5 h60
  text "PTH" at 4487.88,-1472.5 h60
  text "Round" at 4993.76,-1472.5 h60
  text "L1_Signal - L4_Signal" at 5727.56,-1472.5 h60
  text "Pad" at 7017.18,-1472.5 h60
  text "Rounded" at 7607.03,-1472.5 h60
  text "c102h64(Tol13-8)" at 8352.82,-1472.5 h60
  text "5.12mil (0.130mm)" at 10566.18,-1472.5 h60
  text "3.15mil (0.080mm)" at 11899.79,-1472.5 h60
  text "40" at 2738.38,-1622.5 h60
  text "40.16mil (1.020mm)" at 3338.22,-1622.5 h60
  text "PTH" at 4487.88,-1622.5 h60
  text "Round" at 4993.76,-1622.5 h60
  text "L1_Signal - L4_Signal" at 5727.56,-1622.5 h60
  text "Pad" at 7017.18,-1622.5 h60
  text "(Mixed)" at 7607.03,-1622.5 h60
  text "(Mixed)" at 8352.82,-1622.5 h60
  text "5.12mil (0.130mm)" at 10566.18,-1622.5 h60
  text "3.15mil (0.080mm)" at 11899.79,-1622.5 h60
  text "633" at 2738.38,-1772.5 h60
  text "8.00mil (0.203mm)" at 3338.22,-1772.5 h60
  text "PTH" at 4487.88,-1772.5 h60
  text "Round" at 4993.76,-1772.5 h60
  text "L1_Signal - L4_Signal" at 5727.56,-1772.5 h60
  text "Via" at 7017.18,-1772.5 h60
  text "Rounded" at 7607.03,-1772.5 h60
  text "v46h20(Tol13-8)" at 8352.82,-1772.5 h60
  text "5.12mil (0.130mm)" at 10566.18,-1772.5 h60
  text "3.15mil (0.080mm)" at 11899.79,-1772.5 h60
  text "702 Total" at 2738.38,-1922.5 h60